# Altium PCB FanController.PcbDoc
Units mm, origin at the board's own origin, x right, y up, seen from the top; angles counter-clockwise.
Board outline 60 x 50 mm, 2 copper layers (Top Layer, Bottom Layer); 43 components, 27 nets, 110 pads, 30 vias.
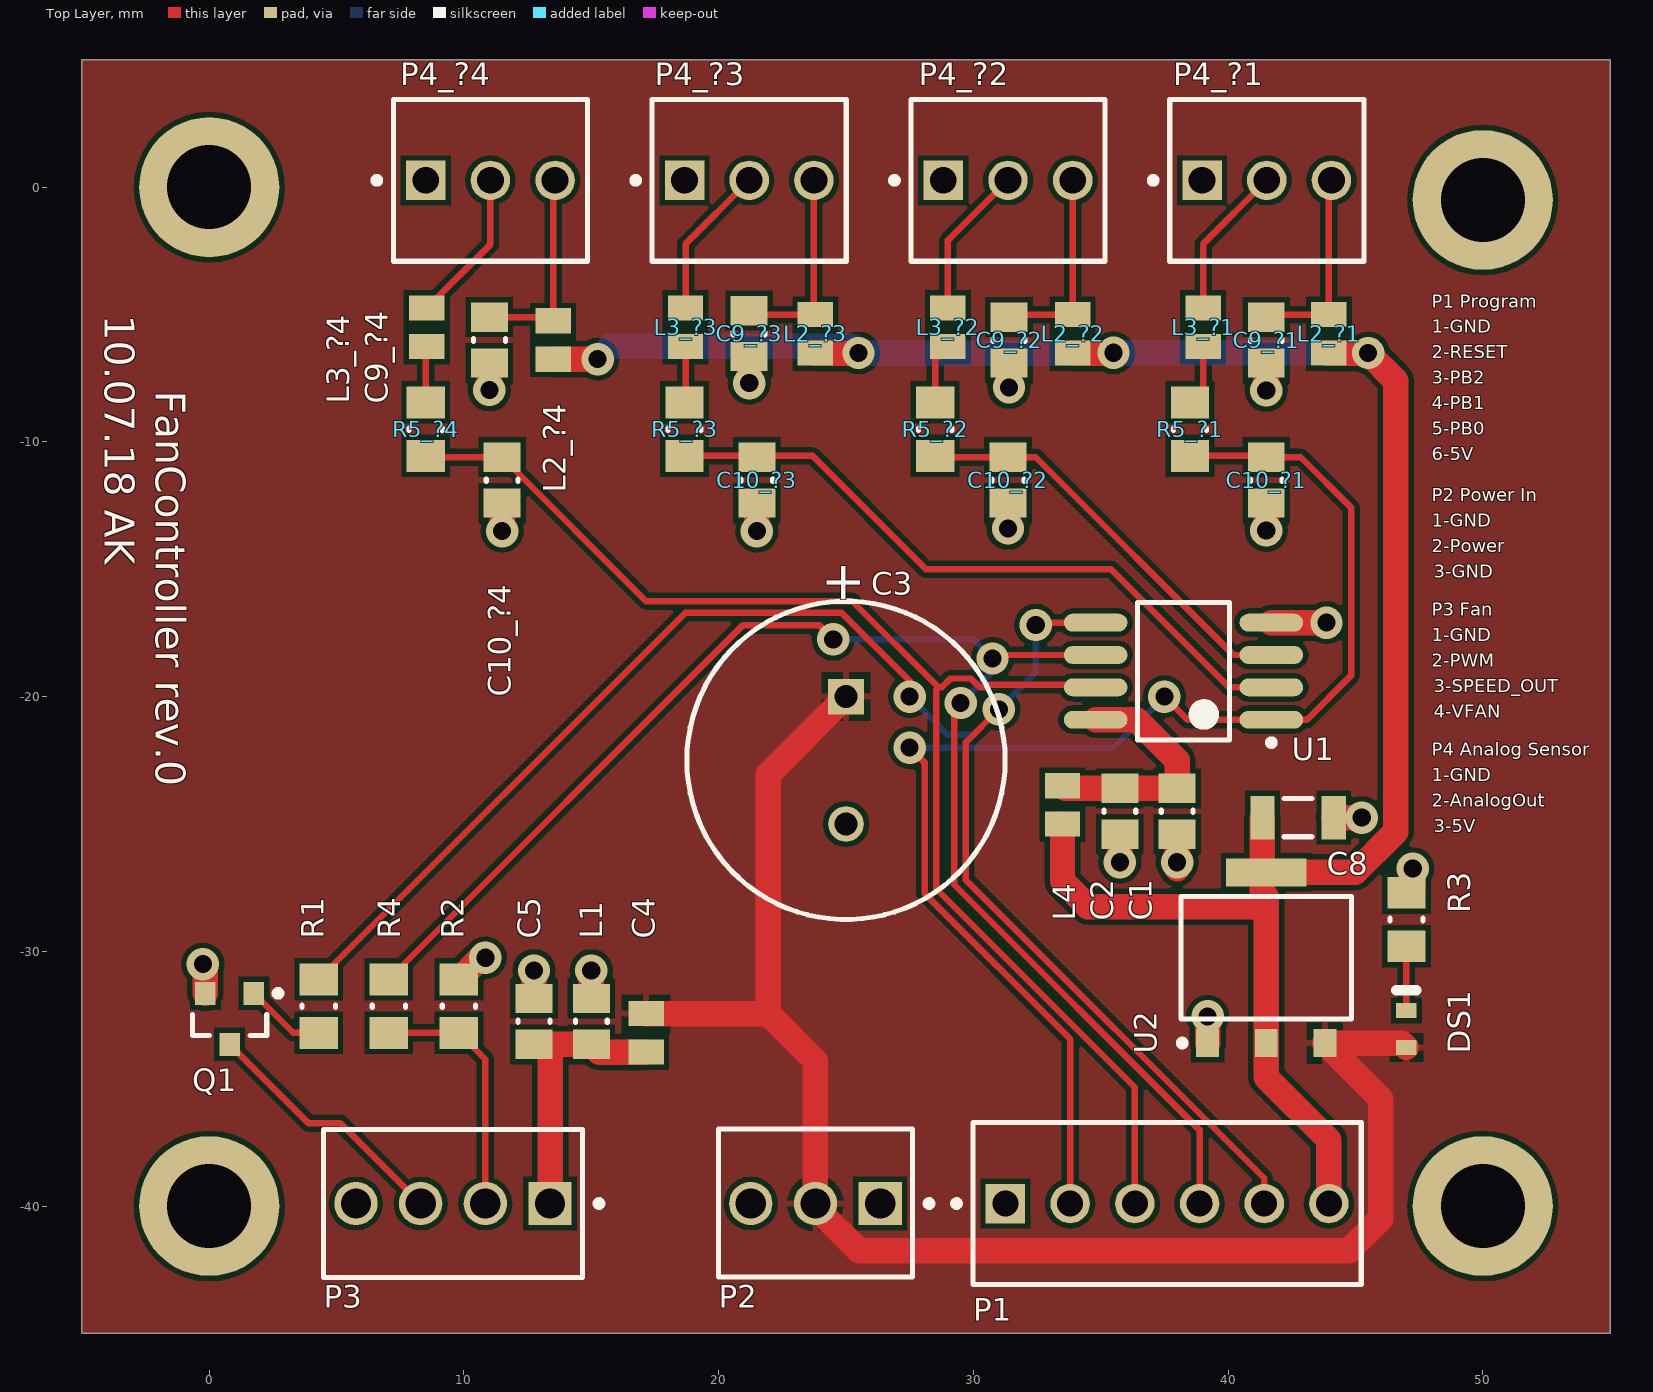
[diagram p0: Top Layer view]
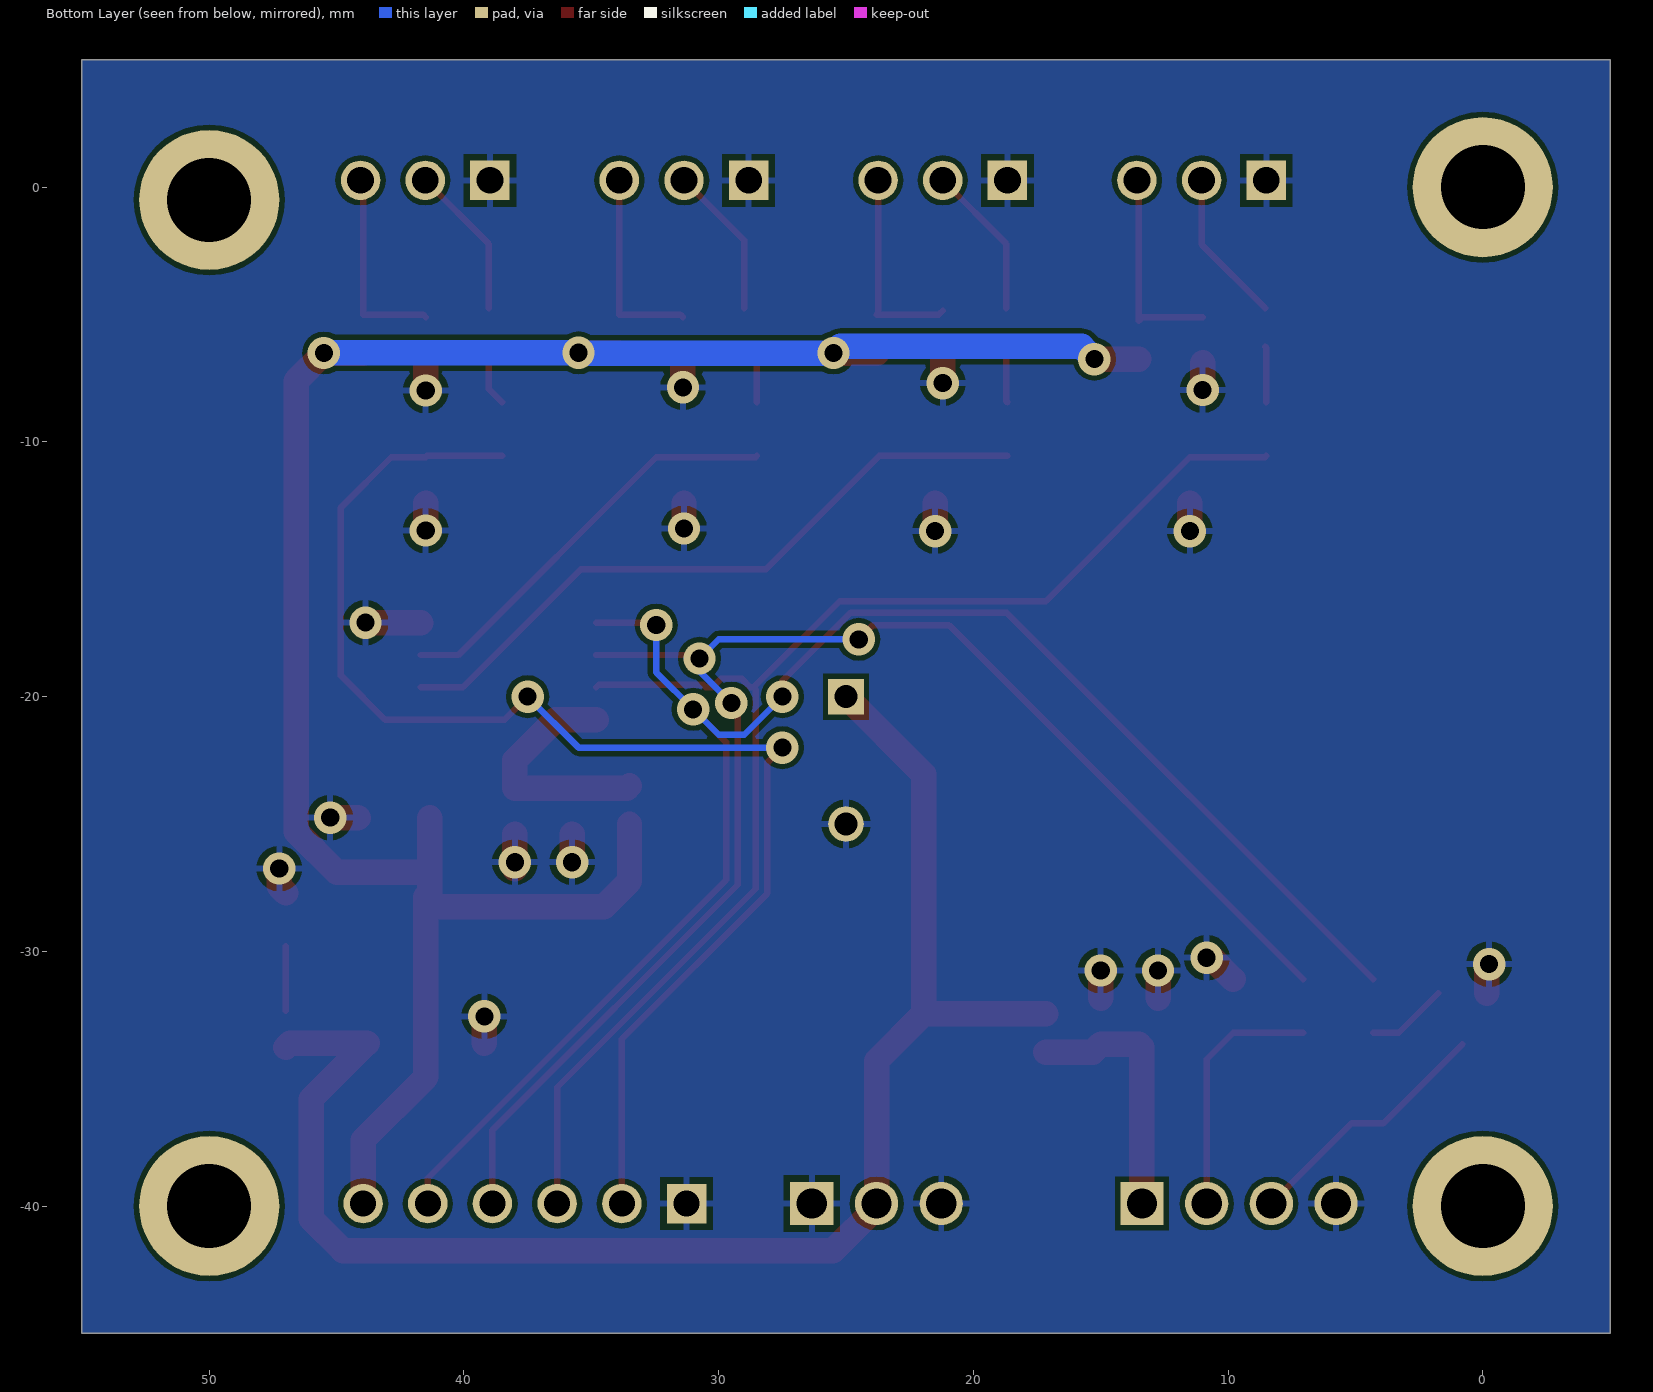
[diagram p1: Bottom Layer view, seen from below]

## Layer stack, top to bottom
Top Solder: solder mask 0.0102, Solder Resist, Dk 3.5
Top Layer: signal copper 0.0356
Dielectric 1: dielectric 0.32, FR-4, Dk 4.8
Bottom Layer: signal copper 0.0356
Bottom Solder: solder mask 0.0102, Solder Resist, Dk 3.5

## Board outline
-5,-45 -5,5 55,5 55,-45

## Design rules (kind name [scope] priority, off if disabled: settings)
Clearance [All] p1: gap=0.2 ignorepadtopadclearanceinfootprint=FALSE
PolygonConnect [All] p1: connectstyle=Relief reliefconductorwidth=0.254 reliefentries=4 polygonreliefangle="90 Angle" airgapwidth=0.254
RoomDefinition FanController [InComponentClass('FanController')] p1: confinementstyle=ConfineIn formatcopy=TRUE lockcomponents=FALSE outline 123.943,-95.616 257.547,-95.616 257.547,-76.439 123.943,-76.439
RoomDefinition ?4 [InComponentClass('?4')] p2: confinementstyle=ConfineIn formatcopy=TRUE lockcomponents=FALSE outline 123.943,-75.042 178.68,-75.042 178.68,-65.39 123.943,-65.39
RoomDefinition ?3 [InComponentClass('?3')] p3: confinementstyle=ConfineIn formatcopy=TRUE lockcomponents=FALSE outline 1210.047,1146.444 1220.207,1146.444 1220.207,1156.858 1210.047,1156.858
RoomDefinition ?2 [InComponentClass('?2')] p4: confinementstyle=ConfineIn formatcopy=TRUE lockcomponents=FALSE outline 1210.047,1146.444 1220.207,1146.444 1220.207,1156.858 1210.047,1156.858
RoomDefinition ?1 [InComponentClass('?1')] p5: confinementstyle=ConfineIn formatcopy=TRUE lockcomponents=FALSE outline 1210.047,1146.444 1219.699,1146.444 1219.699,1156.858 1210.047,1156.858
RoutingVias [All] p1: holewidth=0.5 width=1 viastyle="Through Hole" minholewidth=0.5 minwidth=1 maxholewidth=10 maxwidth=10
SolderMaskExpansion [All] p1: expansion=0.102
Width [All] p1: maxlimit=5 minlimit=0.2 preferedwidth=0.2
30 further rules are at their usual default settings.

## Classes and differential pairs
channel class TempSensor: ?1 ?2 ?3 ?4
component class FanController: C1 C2 C3 C4 C5 C8 DS1 L1 L4 P1 P2 P3 Q1 R1 R2 R3 R4 U1 U2
component class ?4: C9_?4 C10_?4 L2_?4 L3_?4 P4_?4 R5_?4
component class ?3: C9_?3 C10_?3 L2_?3 L3_?3 P4_?3 R5_?3
component class ?2: C9_?2 C10_?2 L2_?2 L3_?2 P4_?2 R5_?2
component class ?1: C9_?1 C10_?1 L2_?1 L3_?1 P4_?1 R5_?1

## Components (designator, comment, footprint, x,y, rotation, side; value= is the part's Value field where it differs from the comment)
C1 "1uF" CAPC0805(2012)145_N 38,-24.5 r90 top value=100nF
C2 "1uF" CAPC0805(2012)145_N 35.75,-24.5 r90 top value=100nF
C3 "ECA-1JHG471" PNSC-ECA-1JHG471 25,-22.5 r270 top
C4 "1uF" CAPC0805(2012)145_N 15,-32.75 r270 top value=100nF
C5 "1uF" CAPC0805(2012)145_N 12.75,-32.75 r270 top value=100nF
C8 "10uF" CAPC1206(3216)130_L 42.75,-24.75 r180 top
C9_?1 "1uF" CAPC0805(2012)145_N 41.5,-6 r270 top value=100nF (schematic designator C9)
C9_?2 "1uF" CAPC0805(2012)145_N 31.4,-6 r270 top value=100nF (schematic designator C9)
C9_?3 "1uF" CAPC0805(2012)145_N 21.2,-5.745 r270 top value=100nF (schematic designator C9)
C9_?4 "1uF" CAPC0805(2012)145_N 11,-6 r270 top value=100nF (schematic designator C9)
C10_?1 "1uF" CAPC0805(2012)145_N 41.5,-11.5 r90 top value=100nF (schematic designator C10)
C10_?2 "1uF" CAPC0805(2012)145_N 31.36,-11.5 r90 top value=100nF (schematic designator C10)
C10_?3 "1uF" CAPC0805(2012)145_N 21.5,-11.5 r90 top value=100nF (schematic designator C10)
C10_?4 "1uF" CAPC0805(2012)145_N 11.5,-11.5 r90 top value=100nF (schematic designator C10)
DS1 "TLMS1100-GS08" VISH-TLMX1100_V 47,-33.05 r90 top
L1 "FBMJ2125HM210NT" INDC2013X105X50LL20T30 17.15,-33.2 r90 top
L2_?1 "FBMJ2125HM210NT" INDC2013X105X50LL20T30 43.96,-5.755 r270 top (schematic designator L2)
L2_?2 "FBMJ2125HM210NT" INDC2013X105X50LL20T30 33.9,-5.755 r270 top (schematic designator L2)
L2_?3 "FBMJ2125HM210NT" INDC2013X105X50LL20T30 23.8,-5.755 r270 top (schematic designator L2)
L2_?4 "FBMJ2125HM210NT" INDC2013X105X50LL20T30 13.5,-6 r270 top (schematic designator L2)
L3_?1 "FBMJ2125HM210NT" INDC2013X105X50LL20T30 39.02,-5.5 r270 top (schematic designator L3)
L3_?2 "FBMJ2125HM210NT" INDC2013X105X50LL20T30 29,-5.5 r270 top (schematic designator L3)
L3_?3 "FBMJ2125HM210NT" INDC2013X105X50LL20T30 18.7,-5.5 r270 top (schematic designator L3)
L3_?4 "FBMJ2125HM210NT" INDC2013X105X50LL20T30 8.54,-5.5 r270 top (schematic designator L3)
L4 "FBMJ2125HM210NT" INDC2013X105X50LL20T30 33.5,-24.25 r270 top
P1 "22-23-2061" MOLX-22-23-2061_V 37.61,-39.9 r0 top
P2 "22-27-2031" MOLX-22-27-2031_V 23.8,-39.9 r180 top
P3 "22-27-2041" MOLX-22-27-2041_V 9.57,-39.9 r0 top
P4_?1 "22-23-2031" MOLX-22-23-2031_V 41.52,0.269 r0 top (schematic designator P4)
P4_?2 "22-23-2031" MOLX-22-23-2031_V 31.36,0.269 r0 top (schematic designator P4)
P4_?3 "22-23-2031" MOLX-22-23-2031_V 21.2,0.269 r0 top (schematic designator P4)
P4_?4 "22-23-2031" MOLX-22-23-2031_V 11.04,0.269 r0 top (schematic designator P4)
Q1 "BC817-25LT1G" ONSC-SOT-23-3-318-08_V 0.8,-32.65 r270 top
R1 "300" RESC0805(2012)_M 7.05,-32.15 r90 top value="300.00 Ohm"
R2 "300" RESC0805(2012)_M 9.8,-32.15 r270 top value="300.00 Ohm"
R3 "300" RESC0805(2012)_M 47,-28.75 r270 top value="300.00 Ohm"
R4 "300" RESC0805(2012)_M 4.3,-32.15 r270 top value="300.00 Ohm"
R5_?1 "300" RESC0805(2012)_M 38.5,-9.5 r270 top value="300.00 Ohm" (schematic designator R5)
R5_?2 "300" RESC0805(2012)_M 28.5,-9.5 r270 top value="300.00 Ohm" (schematic designator R5)
R5_?3 "300" RESC0805(2012)_M 18.66,-9.5 r270 top value="300.00 Ohm" (schematic designator R5)
R5_?4 "300" RESC0805(2012)_M 8.5,-9.5 r270 top value="300.00 Ohm" (schematic designator R5)
U1 "ATtiny85-20SU" 8S2_M 38.25,-19 r180 top
U2 "LT1117IST-5#PBF" LT-ST-3-SOT-223_L 41.5,-30.25 r90 top

## Footprints (in the part's own frame and the unit in brackets; to place one, negate y for a bottom-side part, rotate by r counter-clockwise, add the part's x,y. Pads: shape width x height; smd on the part's side, far side on the other; paste and mask are expansions set on the pad)
8S2_M [mm] "SOP, 8-Leads, Body 5.3x5.3mm, Pitch 1.27mm, IPC Low Density"
  oval 2.5x0.7 smd: 1(-3.45,1.905) 2(-3.45,0.635) 3(-3.45,-0.635) 4(-3.45,-1.905) 5(3.45,-1.905) 6(3.45,-0.635) 7(3.45,0.635) 8(3.45,1.905)
  silkscreen extent -3.57,-2.7 1.8,2.93, body extent -2.7,-2.68 2.7,2.68, height 2.16
CAPC0805(2012)145_N [mm] "Chip Capacitor, Body 2.0x1.2mm, Height 1.45mm, IPC Medium Density"
  rect 1.15x1.45 smd: 1(-0.9,0) 2(0.9,0)
  silkscreen extent -0.05,-0.62 0.05,0.63, body extent -1.1,-0.72 1.1,0.73, height 1.45
CAPC1206(3216)130_L [mm] "Chip Capacitor, Body 3.2x1.6mm, Height 1.3mm, IPC High Density"
  rect 0.95x1.7 smd: 1(-1.4,0) 2(1.4,0)
  silkscreen extent -0.55,-0.75 0.55,0.75, body extent -1.7,-0.9 1.7,0.9, height 1.3
INDC2013X105X50LL20T30 [mm] "Chip Inductor, 2-Leads, Body 2.2x1.45mm, IPC High Density"
  rect 0.99x1.39 smd: 1(-0.755,0) 2(0.755,0)
  body extent -1.1,-0.72 1.1,0.72, height 1.05
LT-ST-3-SOT-223_L [mm] "SOT223, 4-Leads, Body 6.505x3.505mm, Pitch 2.3mm, IPC High Density"
  rect 1.1x0.9 smd: 1(-3.35,2.3) 2(-3.35,0) 3(-3.35,-2.3)
  rect 1.1x3.15 smd: 4(3.35,0)
  silkscreen extent -3.47,-3.35 2.4,3.42, body extent -1.86,-3.35 1.86,3.35, height 1.8
MOLX-22-23-2031_V [mm] "CONN, 3-Leads, Body 7.62x6.35mm, Pitch 2.54mm"
  rect 1.55x1.55 hole 1.05: 1(-2.54,0)
  round 1.55 hole 1.05: 2(0,0) 3(2.54,0)
  silkscreen extent -4.58,-3.17 3.81,3.17, body extent -3.73,-3.25 3.73,3.1, height 10.67
MOLX-22-23-2061_V [mm] "THD, 6-Leads, Body 15.24x6.35mm, Pitch 2.54mm"
  rect 1.55x1.55 hole 1.02: 1(-6.35,0)
  round 1.55 hole 1.02: 2(-3.81,0) 3(-1.27,0) 4(1.27,0) 5(3.81,0) 6(6.35,0)
  silkscreen extent -8.39,-3.17 7.62,3.17, body extent -7.54,-3.25 7.54,3.1, height 10.67
MOLX-22-27-2031_V [mm] "Header, 3-Leads, Body 7.62x5.8mm, Pitch 2.54mm"
  rect 1.7x1.7 hole 1.19 paste+0: 1(-2.54,0)
  round 1.7 hole 1.19 paste+0: 2(0,0) 3(2.54,0)
  silkscreen extent -4.59,-2.92 3.81,2.88, body extent -3.81,-2.92 3.81,2.88, height 11.71
MOLX-22-27-2041_V [mm] "CONN, 4-Leads, Body 10.16x5.8mm, Pitch 2.54mm"
  rect 1.7x1.7 hole 1.19: 1(3.81,0)
  round 1.7 hole 1.19: 2(1.27,0) 3(-1.27,0) 4(-3.81,0)
  silkscreen extent -5.08,-2.9 5.86,2.9, body extent -5.08,-2.9 5.08,2.9, height 11.7
ONSC-SOT-23-3-318-08_V [mm] "SOT23, 3-Leads, Body 2.92x1.3mm, Pitch 0.95mm"
  rect 0.9x0.8 smd: 1(-1,0.95) 2(-1,-0.95) 3(1,0)
  silkscreen extent -1.12,-1.46 0.65,2.03, body extent -0.65,-1.46 0.65,1.46, height 1.11
PNSC-ECA-1JHG471 [mm]
  rect 1.4x1.4 hole 0.9: 1(-2.5,0)
  round 1.4 hole 0.9: 2(2.5,0)
  silkscreen extent -6.25,-6.25 6.25,6.25, body extent -6.25,-6.25 6.25,6.25, height 22
RESC0805(2012)_M [mm] "Chip Resistor, Body 2.0x1.3mm, IPC Low Density"
  rect 1.25x1.5 smd: 1(-1.05,0) 2(1.05,0)
  silkscreen extent -0.05,-0.65 0.05,0.65, body extent -1.1,-0.67 1.1,0.67, height 0.7
VISH-TLMX1100_V [mm] "SMD, 2-Leads, Body 1.6x0.8mm"
  rect 0.6x0.8 smd: 1(-0.725,0) 2(0.725,0)
  silkscreen extent 1.53,-0.4 1.53,0.4, body extent -0.8,-0.4 0.8,0.4, height 0.65

## Part data
C1 C2 C4 C5 C9_?1 C9_?2 C9_?3 C9_?4 C10_?1 C10_?2 C10_?3 C10_?4: library part CMP-1036-04431-1, Case-EIA=0805, Case-Metric=2012, Rated Voltage="100 V", Tolerance=±20%, Max Thickness="1.45 mm", Technology=SMT
C3: library part CMP-1665-00014-2, "CAP ALUM 470UF 63V 20% RADIAL", Manufacturer=Panasonic, ComponentLink1Description=Datasheet, ComponentLink1URL=http://industrial.panasonic.com/cdbs/www-data/pdf/RDF0000/ABA0000C1038.pdf, PackageReference=ECA-1JHG471, PartNumber=ECA-1JHG471
C8: library part CMP-1037-04970-1, "CAP 10uF 10V -20% to +80% 1206 (3216 Metric) Thickness 1.3mm SMD", Case-EIA=1206, Case-Metric=3216, Rated Voltage="10 V", Tolerance="-20% to +80%", Max Thickness="1.3 mm", Technology=SMT
DS1: library part CMP-1666-00027-1, "LED, RED, 2.1 V, -40 to 100 degC, 2-Pin SMD (0603), RoHS, Tape and Reel", Capacitance="12 pF", Case/Package=0603, Case Code (Metric)=1608, Max Operating Temperature=125degC, Min Operating Temperature=-55degC, Package Quantity=4000, Resistance="100000000000 Ohm", Tolerance=5%, Type (Capacitors)=C0G, Voltage Rating="50 V", Case Code (Imperial)=0603, ComponentLink1Description="Manufacturer URL", ComponentLink1URL=http://www.vishay.com/, ComponentLink2Description=Datasheet, ComponentLink2URL=http://www.vishay.com/docs/83173/tlmb1100.pdf, DatasheetVersion="Rev. 2.7, 03/2016", Height="0.8 mm", Length="1.6 mm", Mount="Surface Mount", PackageDescription="2-Pin Surface Mount Device, Body 1.6 x 0.8 mm", PackageReference=TLMX1100, Packaging="Tape and Reel", Pins=2, Radiation Hardening=No, REACH SVHC="No SVHC", RoHSCompliant=True, Voltage Rating (DC)="50 V", Width="0.8 mm"
L1 L2_?1 L2_?2 L2_?3 L2_?4 L3_?1 L3_?2 L3_?3 L3_?4 L4: library part CMP-1660-00003-1, "Chip Inductor, 21 Ohm, +/- 30%, 6 A, -40 to 125 degC, 0805 (2012 Metric), RoHS, Tape and Reel", Case\Package=0805, Case Code (Metric)=2012, Current Rating="6 A", Max Operating Temperature="125 degC", Min Operating Temperature="-40 degC", Package Quantity=1, Resistance="4 mohm", Tolerance=30%, Case Code (Imperial)=0805, ComponentLink1Description="Manufacturer URL", ComponentLink1URL=http://www.t-yuden.com/, ComponentLink2Description=Datasheet, ComponentLink2URL=http://ds.yuden.co.jp/TYCOMPAS/ut/detail.do?productNo=FBMJ2125HM210NT&fileName=FBMJ2125HM210NT_SS&mode=specSheetDownload, Core Material=Ferrite, DatasheetVersion=08/2016, Height="0.85 mm", Impedance="21 Ohm", Length="2 mm", Max Current Rating="6 A", Mount="Surface Mount", Mounting Technology="Surface Mount", PackageDescription="2-Pin Surface Mount Device, Body 2 x 1.25 mm", PackageReference=0805, Packaging="Tape and Reel", REACH SVHC=Unknown, RoHSCompliant=true, Width="1.25 mm"
P1: library part CMP-2000-05536-1, "Male Header, Pitch 2.54 mm, 1 x 6 Position, Height 10.67 mm, Tail Length 3.56 mm, 0 to 70 degC, RoHS, Bulk", Current Rating=4A, Manufacturer=Molex, Package Description="Male Header, Pitch 2.54 mm, 1 x 6 Position, Height 10.67 mm, Tail Length 3.56 mm", Voltage Rating=250V, =002223206122-23-2061-PBA-6373-06A102, Brand=Molex, Contact Material=Brass, Contact Plating=Tin, Datasheet URL=https://datasheet.ciiva.com/19460/232303-19460895.pdf, Datasheet Version="Rev. P, 09/2001", Factory Pack Quantity=1000, Housing Material=Nylon, Manufacturer URL=http://www.molex.com/, Mounting Angle=Vertical, Mounting Style=ThroughHole, Mounting Technology=ThroughHole, Number of Positions=6, Number of Positions / Contacts=6, Number of Rows=1, Package Reference=22-23-2061, Packaging=Bulk, Pitch=2.54mm, Product Category=.100K.K.Connectors, Product Type=Headers, RoHS=Details, Series=6373, Termination Style=ThroughHole, Tradename=KK, Type=PinStrip
P2: library part CMP-2000-05538-1, "Male Header, Pitch 2.54 mm, 1 x 3 Position, Height 11.7 mm, Tail Length 3.56 mm, -40 to 80 degC, RoHS, Bulk", Current Rating=4A, Manufacturer=Molex, Operating temperature=0°Cto+75°C, Package Description="Male Header, Pitch 2.54 mm, 1 x 3 Position, Height 11.7 mm, Tail Length 3.56 mm", Voltage Rating=250V, Contact Material=Tinplatedbrass, Datasheet URL=http://www.molex.com/webdocs/datasheets/pdf/en-us/0022272031_PCB_HEADERS.pdf, Datasheet Version=06/2016, Housing Material=Nylon(UL94V-0), Manufacturer URL=http://www.molex.com/, Mounting Technology=ThroughHole, Package Reference=22-27-2031, Package URL=http://www.molex.com/pdm_docs/sd/022272031_sd.pdf
P3: library part CMP-2000-05243-1, "Male Header, Pitch 2.54 mm, 1 x 4 Position, Height 11.7 mm, Tail Length 3.56 mm, RoHS, Bulk", Current Rating=4A, Manufacturer=Molex, Operating temperature=0degCto+75degC, Voltage Rating=250V, Contact Material=Tinplatedbrass, Datasheet URL=http://www.molex.com/pdm_docs/sd/022272041_sd.pdf, Datasheet Version="Rev. F, 06/2009", Housing Material=Nylon(UL94V-0), Manufacturer URL=http://www.molex.com/
P4_?1 P4_?2 P4_?3 P4_?4: library part CMP-2000-05242-1, "Male Header, Pitch 2.54 mm, 1 x 3 Position, Height 8.18 mm, Tail Length 3.56 mm, RoHS, Bulk", Current Rating=4A, Manufacturer=Molex, Voltage Rating=250V, =0022232031A-6373-03A102, Brand=Molex, Contact Gender=Pin(Male), Contact Material=Brass, Contact Plating=Tin, Datasheet URL=https://datasheet.ciiva.com/19472/232274-19472863.pdf, Datasheet Version=Sep-01, Factory Pack Quantity=16000, Housing Material=Nylon, Manufacturer URL=http://www.molex.com/, Mounting Angle=Vertical, Mounting Style=ThroughHole, Number of Positions=3Position, Number of Rows=1Row, Packaging=Bulk, Pitch=2.54mm, Product=Headers, Product Category=Headers&WireHousings, RoHS=Details, Series=6373, Termination Style=ThroughHole, Tradename=KK, Type=Locking
Q1: library part CMP-1048-00737-1, "General Purpose Transistor, NPN Silicon, 3-Pin SOT-23, Pb-Free, Tape and Reel", Manufacturer="On Semiconductor", ComponentLink1Description="Manufacturer URL", ComponentLink1URL=http://www.onsemi.com/, ComponentLink2Description=Datasheet, ComponentLink2URL=http://www.onsemi.com/pub_link/Collateral/BC817-16LT1-D.PDF, ComponentLink3Description="Package Specification", ComponentLink3URL=http://www.onsemi.cn/pub_link/Collateral/318-08.PDF, DatasheetVersion="Rev. 12", fT Min (MHz)=100, IC Continuous (A)=0.5, Mounting Technology="Surface Mount", PackageDescription="3-Pin Small Outline Transistor, Body 2.92 x 1.3 mm, Pitch 0.95 mm", PackageReference=SOT-23-3-318-08, PackageVersion="Rev. AP, 11/2009", Packing="Tape and Reel", PartNumber=BC817-25LT1G, Polarity=NPN, RoHS=TRUE
R1 R2 R3 R4 R5_?1 R5_?2 R5_?3 R5_?4: library part CMP-1013-00449-1, "300R 0.125W 1% 0805 (2012 Metric)  SMD", Case-EIA=0805, Case-Metric=2012, Power="0.125 W", Tolerance="1 %", Technology=SMT
U1: library part CMP-0093-00173-2, "8-bit AVR Microcontroller, 20MHz, 2.7-5.5V, 8K Flash, 512 Bytes EEPROM, 512 Bytes SRAM, Industrial Grade (-40°C to 85°C), 8-Lead SOIC, Pb-Free", ComponentLink1Description="Manufacturer URL", ComponentLink1URL=http://www.atmel.com/, ComponentLink2Description="ATtiny25/45/85 Datasheet", ComponentLink2URL=http://www.atmel.com/dyn/resources/prod_documents/doc2586.pdf, ComponentLink3Description="ATtiny25/45/85 Summary", ComponentLink3URL=http://www.atmel.com/dyn/resources/prod_documents/2586S.pdf, DatasheetVersion="revN, Apr-2011", PackageReference=8S2, PackageVersion="revF, Apr-2008", RevisionNote="DatasheetVersion updated. URLs added."
U2: library part CMP-0476-01858-1, "0.8 A Low Dropout Positive Regulator, 2.45 to 15 V Vin, 5 V Vout, 3-pin SOT223 (ST-3), -40 to 125 degC, Pb-Free", Dropout Voltage(V)=1.1, Manufacturer="Linear Technology", Output Voltage="5 V", ComponentLink1Description="Manufacturer URL", ComponentLink1URL=http://www.linear.com/, ComponentLink2Description=Datasheet, ComponentLink2URL=http://cds.linear.com/docs/en/datasheet/1117fd.pdf, ComponentLink3Description="Package Specification", ComponentLink3URL=http://cds.linear.com/docs/en/packaging/SOT_3_05-08-1630.pdf, DatasheetVersion="Rev. D", Discrete Pass Element=no, Iout(mA)=800, Isupply(mA)=5, Mounting Technology="Surface Mount", Number of Outputs=1, PackageDescription="3-Pin Plastic SOT-223, 3.505 x 6.505 mm Body, Pitch 2.3 mm", PackageReference=ST-3, PackageVersion=Jun-10, PartNumber=LT1117IST-5#PBF, PSRR(dB)=75, RoHS=TRUE, Vin Max(V)=15, Vin Min(V)=2.45

## Free pads (board coordinates)
  round 5.5 hole 3.3: 44(0,-40) 45(0,0) 46(50,-0.5) 47(50,-40)

## Via types
v1: diameter 1.27, hole 0.711, Top Layer to Bottom Layer, 30 vias

## Nets (pads, with @x,y where several pads share a name; then routed paths per layer and width w, separated by ;. In a path a pad name is that pad's centre, name@x,y a point inside that pad or via, vN(x,y) a via of type N, cw(c..) or ccw(c..) an arc to the next point about the centre after c; other vN are vias at no path point)
5V: C8.2 L2_?1.2 L2_?2.2 L2_?3.2 L2_?4.2 L4.2 P1.6 U2.2 U2.4 | length 89.4
  Top Layer w1: L2_?4.2 15.245,-6.755 v1(15.25,-6.75) ; L2_?3.2 v1(25.49,-6.51) ; L4.2 33.5,-27.25 34.5,-28.25 41.35,-28.25 41.35,-27.7 ; L2_?2.2 35.49,-6.51 v1(35.5,-6.5) ; C8.2 41.35,-27.7 ; U2.4 44.988,-26.9 46.585,-25.303 46.585,-7.595 v1(45.5,-6.51) L2_?1.2 ; P1.6 43.96,-37.41 41.5,-34.95 U2.2 41.5,-27.85 41.35,-27.7
  Bottom Layer w1: v1(15.25,-6.75) 15.75,-6.25 25.23,-6.25 v1(25.49,-6.51) 35.49,-6.51 v1(35.5,-6.5) 45.49,-6.5 v1(45.5,-6.51)
GND: C1.1 C2.1 C3.2 C4.1 C5.1 C8.1 C9_?1.2 C9_?2.2 C9_?3.2 C9_?4.2 C10_?1.1 C10_?2.1 C10_?3.1 C10_?4.1 P1.1 P2.1 P2.3 P3.4 P4_?1.1 P4_?2.1 P4_?3.1 P4_?4.1 Q1.2 R2.1 R3.1 U1.4 U2.1 | length 21
  Top Layer w1: v1(-0.25,-30.5) -0.15,-30.6 Q1.2 ; R2.1 10.65,-30.25 v1(10.84,-30.25) ; v1(11,-7.96) C9_?4.2 ; v1(11.5,-13.5) C10_?4.1 ; C5.1 v1(12.75,-30.75) ; C4.1 v1(15,-30.75) ; v1(21.2,-7.69) C9_?3.2 ; v1(21.5,-13.5) C10_?3.1 ; v1(31.36,-13.4) C10_?2.1 ; v1(31.4,-7.86) C9_?2.2 ; v1(35.75,-26.5) C2.1 ; v1@38,-26.75 v1(38,-26.5) C1.1 ; U2.1 v1(39.2,-32.55) ; v1(41.5,-13.48) C10_?1.1 ; v1(41.5,-7.98) C9_?1.2 ; U1.4 v1(43.865,-17.095) ; C8.1 v1(45.25,-24.75) ; R3.1 47.25,-27.45 v1(47.25,-26.75)
NetC1_2: C1.2 C2.2 L4.1 U1.8 | length 9.5
  Top Layer w1: L4.1 33.605,-23.6 C2.2 C1.2 38,-22.5 36.405,-20.905 U1.8
NetC4_2: C4.2 C5.2 L1.1 P3.1 | length 10.1
  Top Layer w1: P3.1 13.38,-33.77 13.5,-33.65 C4.2 15.305,-33.955 L1.1
NetC9_?1_1: C9_?1.1 L2_?1.1 P4_?1.3 | length 7.8
  Top Layer w0.254: C9_?1.1 41.6,-5 L2_?1.1 43.96,0.169 P4_?1.3
NetC9_?2_1: C9_?2.1 L2_?2.1 P4_?2.3 | length 7.8
  Top Layer w0.254: C9_?2.1 31.5,-5 L2_?2.1 P4_?2.3
NetC9_?3_1: C9_?3.1 L2_?3.1 P4_?3.3 | length 8
  Top Layer w0.254: C9_?3.1 21.355,-5 L2_?3.1 23.74,-4.94 P4_?3.3
NetC9_?4_1: C9_?4.1 L2_?4.1 P4_?4.3 | length 8.1
  Top Layer w0.254: C9_?4.1 13.355,-5.1 L2_?4.1 13.5,0.189 P4_?4.3
NetDS1_2: DS1.2 R3.2 | length 2.5
  Top Layer w0.254: DS1.2 R3.2
NetL3_?1_1: L3_?1.1 P4_?1.2 | length 6
  Top Layer w0.254: L3_?1.1 39.02,-2.231 P4_?1.2
NetL3_?1_2: L3_?1.2 R5_?1.1 | length 2.4
  Top Layer w0.254: R5_?1.1 39.02,-7.93 L3_?1.2
NetL3_?2_1: L3_?2.1 P4_?2.2 | length 6
  Top Layer w0.254: L3_?2.1 29,-2.091 P4_?2.2
NetL3_?2_2: L3_?2.2 R5_?2.1 | length 2.4
  Top Layer w0.254: R5_?2.1 28.5,-6.755 L3_?2.2
NetL3_?3_1: L3_?3.1 P4_?3.2 | length 6
  Top Layer w0.254: L3_?3.1 18.7,-2.231 P4_?3.2
NetL3_?3_2: L3_?3.2 R5_?3.1 | length 2.2
  Top Layer w0.254: R5_?3.1 18.7,-8.41 L3_?3.2
NetL3_?4_1: L3_?4.1 P4_?4.2 | length 6
  Top Layer w0.254: L3_?4.1 11.04,-2.245 P4_?4.2
NetL3_?4_2: L3_?4.2 R5_?4.1 | length 2.2
  Top Layer w0.254: R5_?4.1 8.5,-6.295 L3_?4.2
NetP3_2: P3.2 R1.1 R2.2 | length 9.9
  Top Layer w0.254: R1.1 R2.2 10.84,-34.24 P3.2
NetP3_3: P3.3 Q1.3 | length 10.1
  Top Layer w0.254: Q1.3 3.9,-36.75 5.15,-36.75 P3.3
NetQ1_1: Q1.1 R4.2 | length 3.2
  Top Layer w0.254: Q1.1 3.3,-33.2 R4.2
PB0: P1.5 R4.1 U1.5 | length 66.5
  Top Layer w0.254: R4.1 18.696,-16.704 24.819,-16.704 27.5,-19.385 v1(27.5,-20) ; v1(31,-20.5) 29.704,-21.796 29.704,-27.197 41.42,-38.913 P1.5 ; v1(32.45,-17.19) 32.545,-17.095 U1.5
  Bottom Layer w0.254: v1(27.5,-20) 29,-21.5 30,-21.5 v1(31,-20.5) 32.45,-19.05 v1(32.45,-17.19)
PB1: P1.4 R1.2 U1.6 | length 60.8
  Top Layer w0.254: R1.2 20.96,-17.19 23.94,-17.19 v1(24.5,-17.75) ; v1(29.5,-20.25) 29.25,-20.5 29.25,-27.385 38.88,-37.015 P1.4 ; v1(30.75,-18.5) 30.885,-18.365 U1.6
  Bottom Layer w0.254: v1(24.5,-17.75) 30,-17.75 v1(30.75,-18.5) 31.25,-18.5 v1(29.5,-20.25)
PB2: C10_?4.2 P1.3 R5_?4.2 U1.7 | length 54
  Top Layer w0.254: R5_?4.2 8.55,-10.6 C10_?4.2 17.15,-16.25 25.25,-16.25 28.635,-19.635 ; U1.7 34.703,-19.538 30.602,-19.538 30.505,-19.635 30.245,-19.635 29.898,-19.288 29.102,-19.288 28.755,-19.635 28.635,-19.635 ; P1.3 36.34,-35.34 28.538,-27.538 28.538,-19.732 28.635,-19.635
PB3: C10_?3.2 R5_?3.2 U1.2 | length 26.8
  Top Layer w0.254: R5_?3.2 23.69,-10.55 28.14,-15 35.405,-15 40.04,-19.635 U1.2
PB4: C10_?2.2 R5_?2.2 U1.3 | length 16.4
  Top Layer w0.254: R5_?2.2 28.55,-10.6 C10_?2.2 32.45,-10.6 40.215,-18.365 U1.3
PB5: C10_?1.2 P1.2 R5_?1.2 U1.1 | length 53.5
  Top Layer w0.254: v1(27.5,-22) 28.084,-22.584 28.084,-27.726 33.8,-33.442 P1.2 ; v1(37.5,-20) 38.405,-20.905 U1.1 43.095,-20.905 44.827,-19.173 44.827,-12.577 42.85,-10.6 C10_?1.2 41.45,-10.55 R5_?1.2
  Bottom Layer w0.254: v1(27.5,-22) 35.5,-22 v1(37.5,-20)
PIN: C3.1 DS1.1 L1.2 P2.2 U2.3 | length 61.4
  Top Layer w1: L1.2 21.945,-32.445 ; C3.1 21.945,-23.055 21.945,-32.445 ; DS1.1 46.825,-33.6 U2.3 46,-35.8 46,-40.5 44.75,-41.75 25.5,-41.75 23.8,-40.05 P2.2 23.8,-34.3 21.945,-32.445

## Polygon pours and split planes (outlines as drawn)
GND on Bottom Layer (solid, remove dead copper, pour order 2): -5,5 55,5 55,-45 -5,-45
PIN on Top Layer (solid, remove dead copper, pour order 0): -5,5 55,5 55,-45 -5,-45

## Silkscreen, mask and mechanical layers (free items; w line width, h text height)
Top Overlay:
  text "P1 Program" at 48,-4.9 h0.89
  text "10.07.18 AK" at -4.5,-5 h2 r270
  text "1-GND" at 48,-5.9 h0.89
  text "2-RESET" at 48,-6.9 h0.89
  text "3-PB2" at 48,-7.9 h0.89
  text "FanController rev.0" at -2.5,-8 h2 r270
  text "4-PB1" at 48,-8.9 h0.89
  text "5-PB0" at 48,-9.9 h0.89
  text "6-5V" at 48,-10.9 h0.89
  text "P2 Power In" at 48,-12.5 h0.89
  text "1-GND" at 48,-13.5 h0.89
  text "2-Power" at 48,-14.5 h0.89
  text "3-GND" at 48.075,-15.5 h0.89
  text "P3 Fan" at 48,-17 h0.89
  text "1-GND" at 48,-18 h0.89
  text "2-PWM" at 48,-19 h0.89
  text "3-SPEED_OUT" at 48.075,-20 h0.89
  text "4-VFAN" at 48.075,-21 h0.89
  text "P4 Analog Sensor" at 48,-22.5 h0.89
  text "1-GND" at 48,-23.5 h0.89
  text "2-AnalogOut" at 48,-24.5 h0.89
  text "3-5V" at 48.075,-25.5 h0.89
Mechanical 1:
  the board outline again, w0.254

## Text inside footprints (layer, text, board x,y; h text height)
C3: Top Overlay "+" at 24.25,-14.655 h1.5 r270